# Altium PCB bbr18_thrower_board.PcbDoc
Units mm, origin at the board's own origin, x right, y up, seen from the top; angles counter-clockwise.
Board outline 42 x 17 mm, 2 copper layers (Top Layer, Bottom Layer), stack 1.571 mm thick; 6 components, 6 nets, 17 pads, 0 vias.
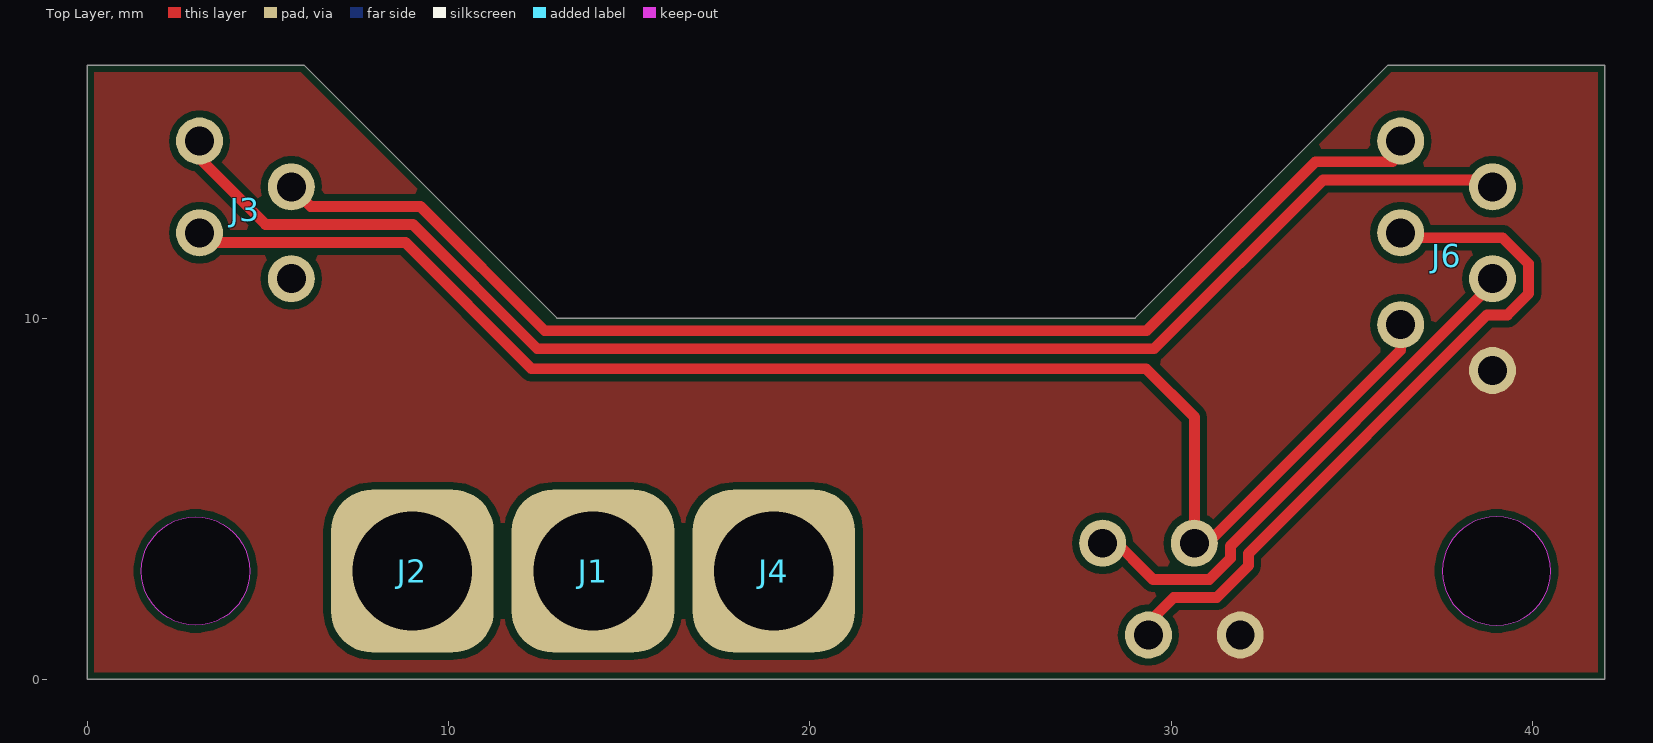
[diagram p0: Top Layer view]
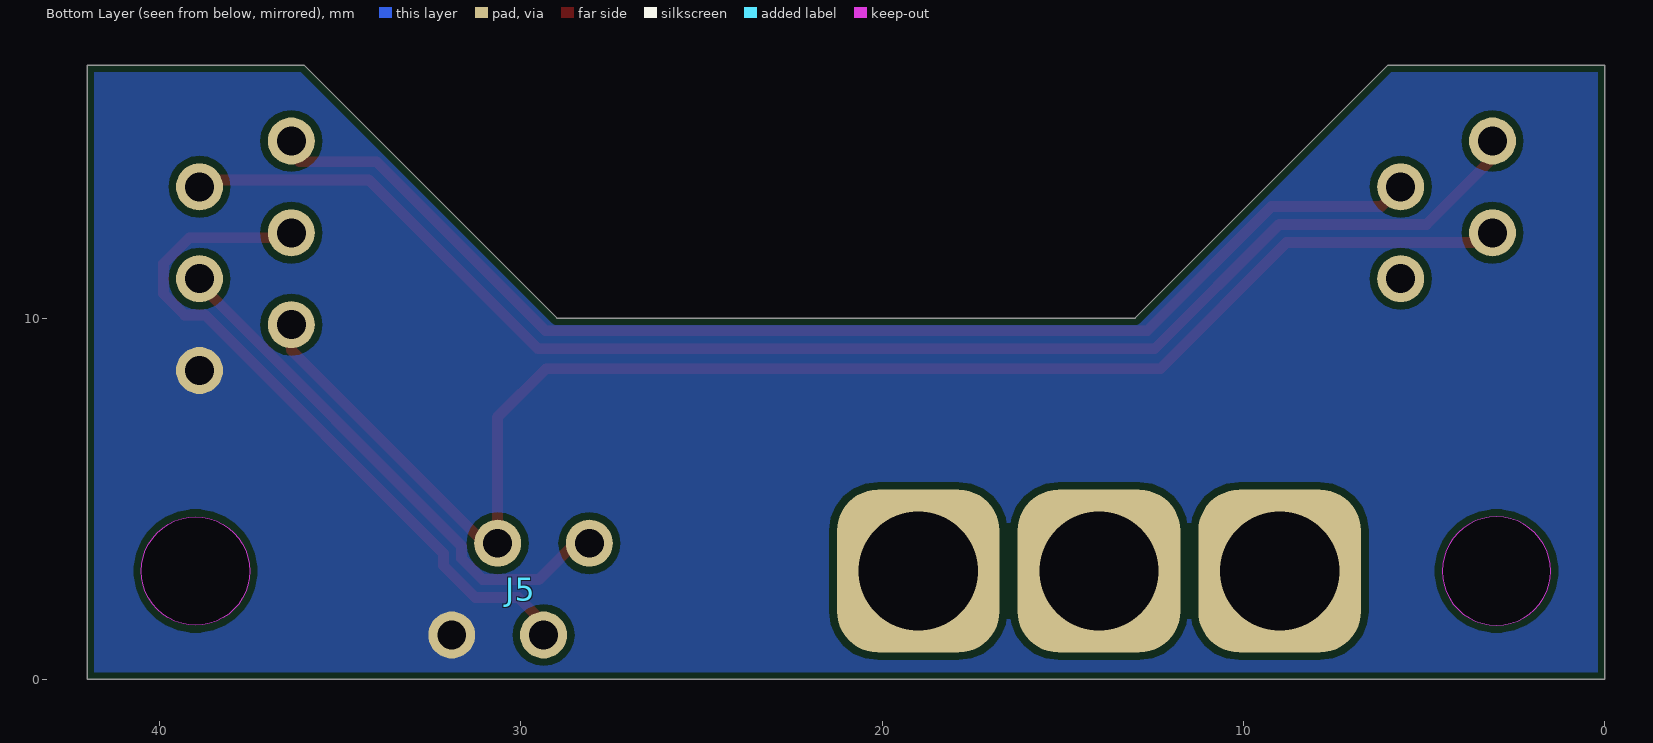
[diagram p1: Bottom Layer view, seen from below]

## Layer stack, top to bottom
Top Solder: solder mask 0.0102, Solder Resist, Dk 3.5
Top Layer: signal copper 0.0356
Dielectric 1: dielectric 1.5, FR-4, Dk 4.8
Bottom Layer: signal copper 0.0356
Bottom Solder: solder mask 0.0102, Solder Resist, Dk 3.5

## Board outline
0,0 0,17 6,17 13,10 29,10 36,17 42,17 42,0
cut-out: 37.5,3 ccw(c39,3) 39,1.5 ccw(c39,3) 40.5,3 ccw(c39,3) 39,4.5 ccw(c39,3)
cut-out: 3,1.5 cw(c3,3) 1.5,3 cw(c3,3) 3,4.5 cw(c3,3) 4.5,3 cw(c3,3)

## Design rules (kind name [scope] priority, off if disabled: settings)
BoardOutlineClearance [All] p1: gap=0.2 ignorepadtopadclearanceinfootprint=FALSE except(0: Arc-SplitContinuation Track-SplitContinuation SMDPad-SplitContinuation THPad-SplitContinuation Via-SplitContinuation Fill-SplitContinuation Poly-SplitContinuation Region-SplitContinuation Text-SplitContinuation)
Clearance ClearanceKeepOut [All vs OnLayer('Keep-Out Layer')] p1: gap=0.1 ignorepadtopadclearanceinfootprint=FALSE
Clearance [All] p2: gap=0.2 ignorepadtopadclearanceinfootprint=FALSE
ComponentClearance NetTieClearance [HasFootprint('NET-TIE-0602')] p1: gap=0 collisioncheckmode=3 verticalgap=0 showdistances=FALSE
ComponentClearance [All] p2: gap=0.2 collisioncheckmode=3 verticalgap=0.2 showdistances=FALSE
DiffPairsRouting [All] p1: maxlimit=0.3 minlimit=0.2 mostfreqgap=0.2 toplayer_minwidth=0.2 toplayer_maxwidth=1 toplayer_prefwidth=0.3 bottomlayer_minwidth=0.2 bottomlayer_maxwidth=1 bottomlayer_prefwidth=0.3 maxuncoupledlength=12.7
HoleSize [All] p1: absolutevalues=TRUE maxlimit=5 minlimit=0.3 maxpercent=80.000 minpercent=20.000
HoleToHoleClearance [All] p1: gap=0.2 allowstackedmicrovias=TRUE
MinimumSolderMaskSliver [All] p1: minsoldermaskwidth=0.2
PolygonConnect [All] p1: connectstyle=Direct reliefconductorwidth=0.254 reliefentries=4 polygonreliefangle="90 Angle" airgapwidth=0.254
RoomDefinition bbr18_thrower_board [InComponentClass('bbr18_thrower_board')] p1: confinementstyle=ConfineIn formatcopy=TRUE lockcomponents=FALSE outline -25.4,-25.4 94,-25.4 94,37 -25.4,37
RoutingVias [All] p1: holewidth=0.3 width=0.6 viastyle="Through Hole" minholewidth=0.3 minwidth=0.6 maxholewidth=2 maxwidth=3
SolderMaskExpansion SolderMaskExpansionVia [IsVia And (Not IsTestpoint)] p1: expansion=-5
SolderMaskExpansion [All] p2: expansion=0.1
Width [All] p1: maxlimit=5 minlimit=0.2 preferedwidth=0.3
25 further rules are at their usual default settings.

## Components (designator, comment, footprint, x,y, rotation, side; value= is the part's Value field where it differs from the comment)
J1 "HEADER-1" 2MM-BULLET-PLUG-VIA 14,3 r0 top
J2 "HEADER-1" 2MM-BULLET-PLUG-VIA 9,3 r0 top
J3 "HEADER-4" MICRO-MATCH-FOB-SIDE-04 5.65,11.09 r270 top
J4 "HEADER-1" 2MM-BULLET-PLUG-VIA 19,3 r0 top
J5 "HEADER-4" MICRO-MATCH-MOB-04 31.91,1.23 r180 bottom
J6 "HEADER-6" MICRO-MATCH-FOB-SIDE-06 36.35,14.9 r90 top

## Footprints (in the part's own frame and the unit in brackets; to place one, negate y for a bottom-side part, rotate by r counter-clockwise, add the part's x,y. Pads: shape width x height; smd on the part's side, far side on the other; paste and mask are expansions set on the pad)
2MM-BULLET-PLUG-VIA [mm]
  rrect50% 4.5x4.5 hole 3.3: 1(0,0)
MICRO-MATCH-FOB-SIDE-04 [mm]
  round 1.3 hole 0.8: 1(0,0) 2(-1.27,-2.54) 3(-2.54,0) 4(-3.81,-2.54)
  body extent -5.41,-3.95 1.6,1.05, height 5.67
MICRO-MATCH-FOB-SIDE-06 [mm]
  round 1.3 hole 0.8: 1(0,0) 2(-1.27,-2.54) 3(-2.54,0) 4(-3.81,-2.54) 5(-5.08,0) 6(-6.35,-2.54)
  body extent -7.95,-3.95 1.6,1.05, height 5.67
MICRO-MATCH-MOB-04 [mm]
  round 1.3 hole 0.8: 1(0,0) 2(1.27,2.54) 3(2.54,0) 4(3.81,2.54)
  body extent -2.22,-1.23 6.04,3.77, height 6.9

## Nets (pads, with @x,y where several pads share a name; then routed paths per layer and width w, separated by ;. In a path a pad name is that pad's centre, name@x,y a point inside that pad or via, vN(x,y) a via of type N, cw(c..) or ccw(c..) an arc to the next point about the centre after c; other vN are vias at no path point)
5V: J3.2 J5.2 J6.5 | length 41.8
  Top Layer w0.3: J3.2 3.38,12.09 8.81,12.09 12.3,8.6 29.3,8.6 30.64,7.26 J5.2 31.007,3.77 36.35,9.113 J6.5
BALL1: J5.3 J6.3 | length 19.6
  Top Layer w0.3: J5.3 29.37,1.57 30.07,2.27 31.261,2.27 32.14,3.149 32.14,3.489 38.741,10.09 39.304,10.09 39.89,10.676 39.89,11.504 39.169,12.225 36.485,12.225 J6.3
BALL2: J5.4 J6.4 | length 15.3
  Top Layer w0.3: J5.4@28,3.95 28.318,3.95 29.498,2.77 31.054,2.77 31.64,3.356 31.64,3.696 38.616,10.671 38.89,10.671 J6.4
GND: J5.1 J6.6
LED1: J3.3 J6.1 | length 34.7
  Top Layer w0.3: J3.3 6.19,13.09 9.224,13.09 12.664,9.65 29.318,9.65 33.993,14.325 36.125,14.325 36.35,14.55 J6.1
LED2: J3.4 J6.2 | length 40.5
  Top Layer w0.3: J3.4 3.11,14.421 4.941,12.59 9.017,12.59 12.457,9.15 29.525,9.15 34.2,13.825 38.695,13.825 J6.2
pads on no net: J1.1 J2.1 J3.1 J4.1

## Polygon pours and split planes (outlines as drawn)
GND on Top Layer "Top Layer-GND" (solid, remove dead copper, pour order 0): 0,0 0,17 42,17 42,0
GND on Bottom Layer "Bottom Layer-GND" (solid, remove dead copper, pour order 2): 0,0 0,17 42,17 42,0

## Silkscreen, mask and mechanical layers (free items; w line width, h text height)
Mechanical 1:
  circle w0.013: c3,3 r1.5
  circle w0.013: c14,3 r1.65
  circle w0.013: c9,3 r1.65
  circle w0.013: c19,3 r1.65
  circle w0.013: c39,3 r1.5
  lines w0.013: 0,0 0,17 6,17 13,10 29,10 36,17 42,17 42,0 0,0